# Altium PCB BLE_Motion_Tracker_PCB.PcbDoc
Units mil, origin at the board's own origin, x right, y up, seen from the top; angles counter-clockwise.
Board outline 1500 x 1500 mil, 4 copper layers (Top Layer, Ground Layer, Power Layer, Bottom Layer), stack 23.756 mil thick; 15 components, 15 nets, 79 pads, 22 vias.
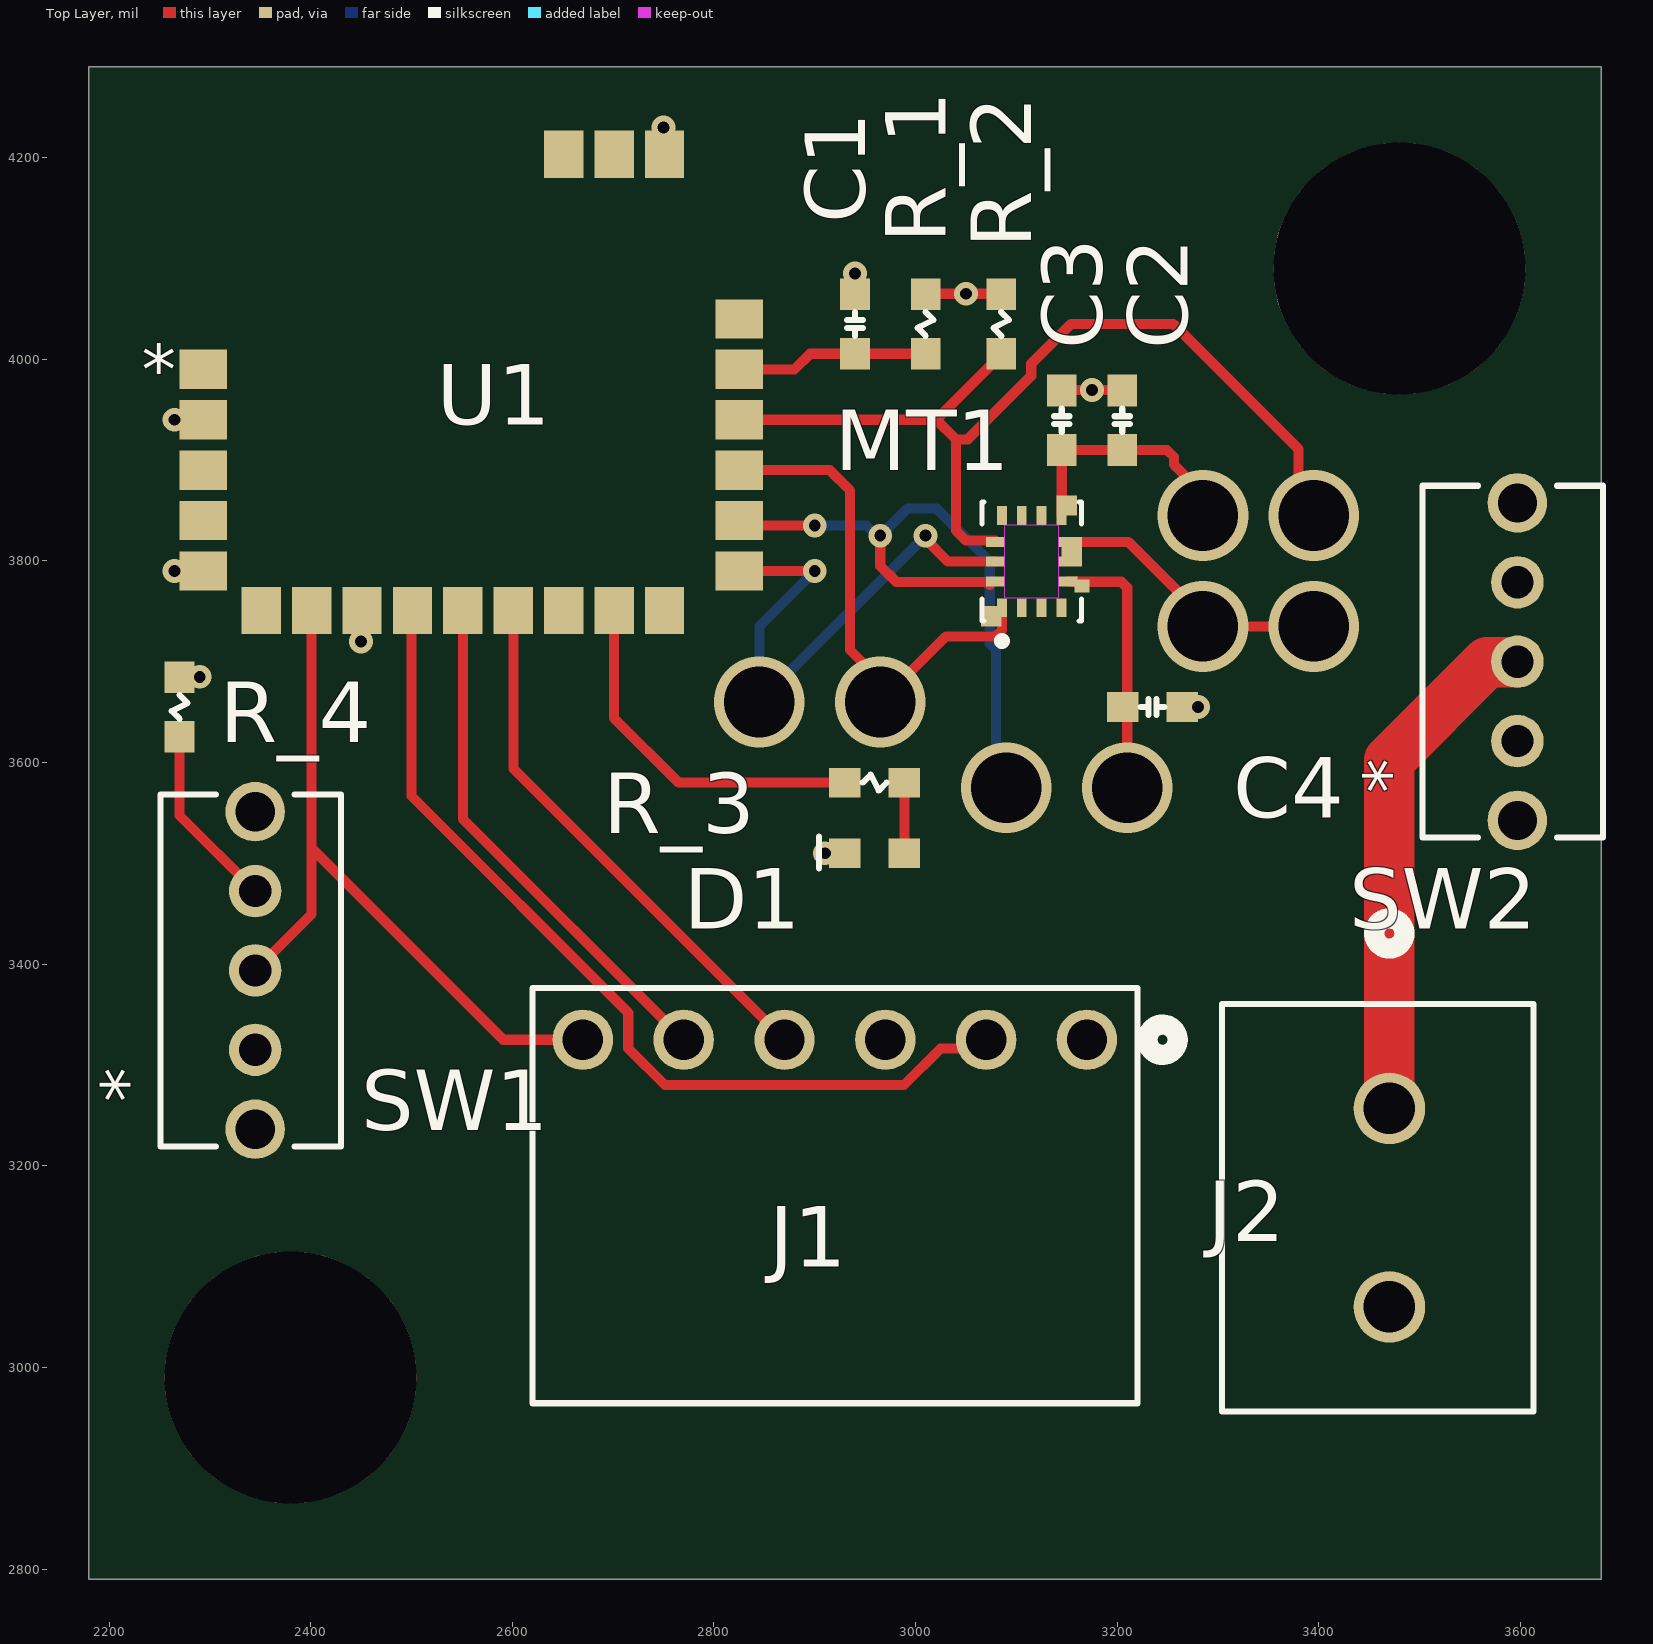
[diagram p0: Top Layer view]
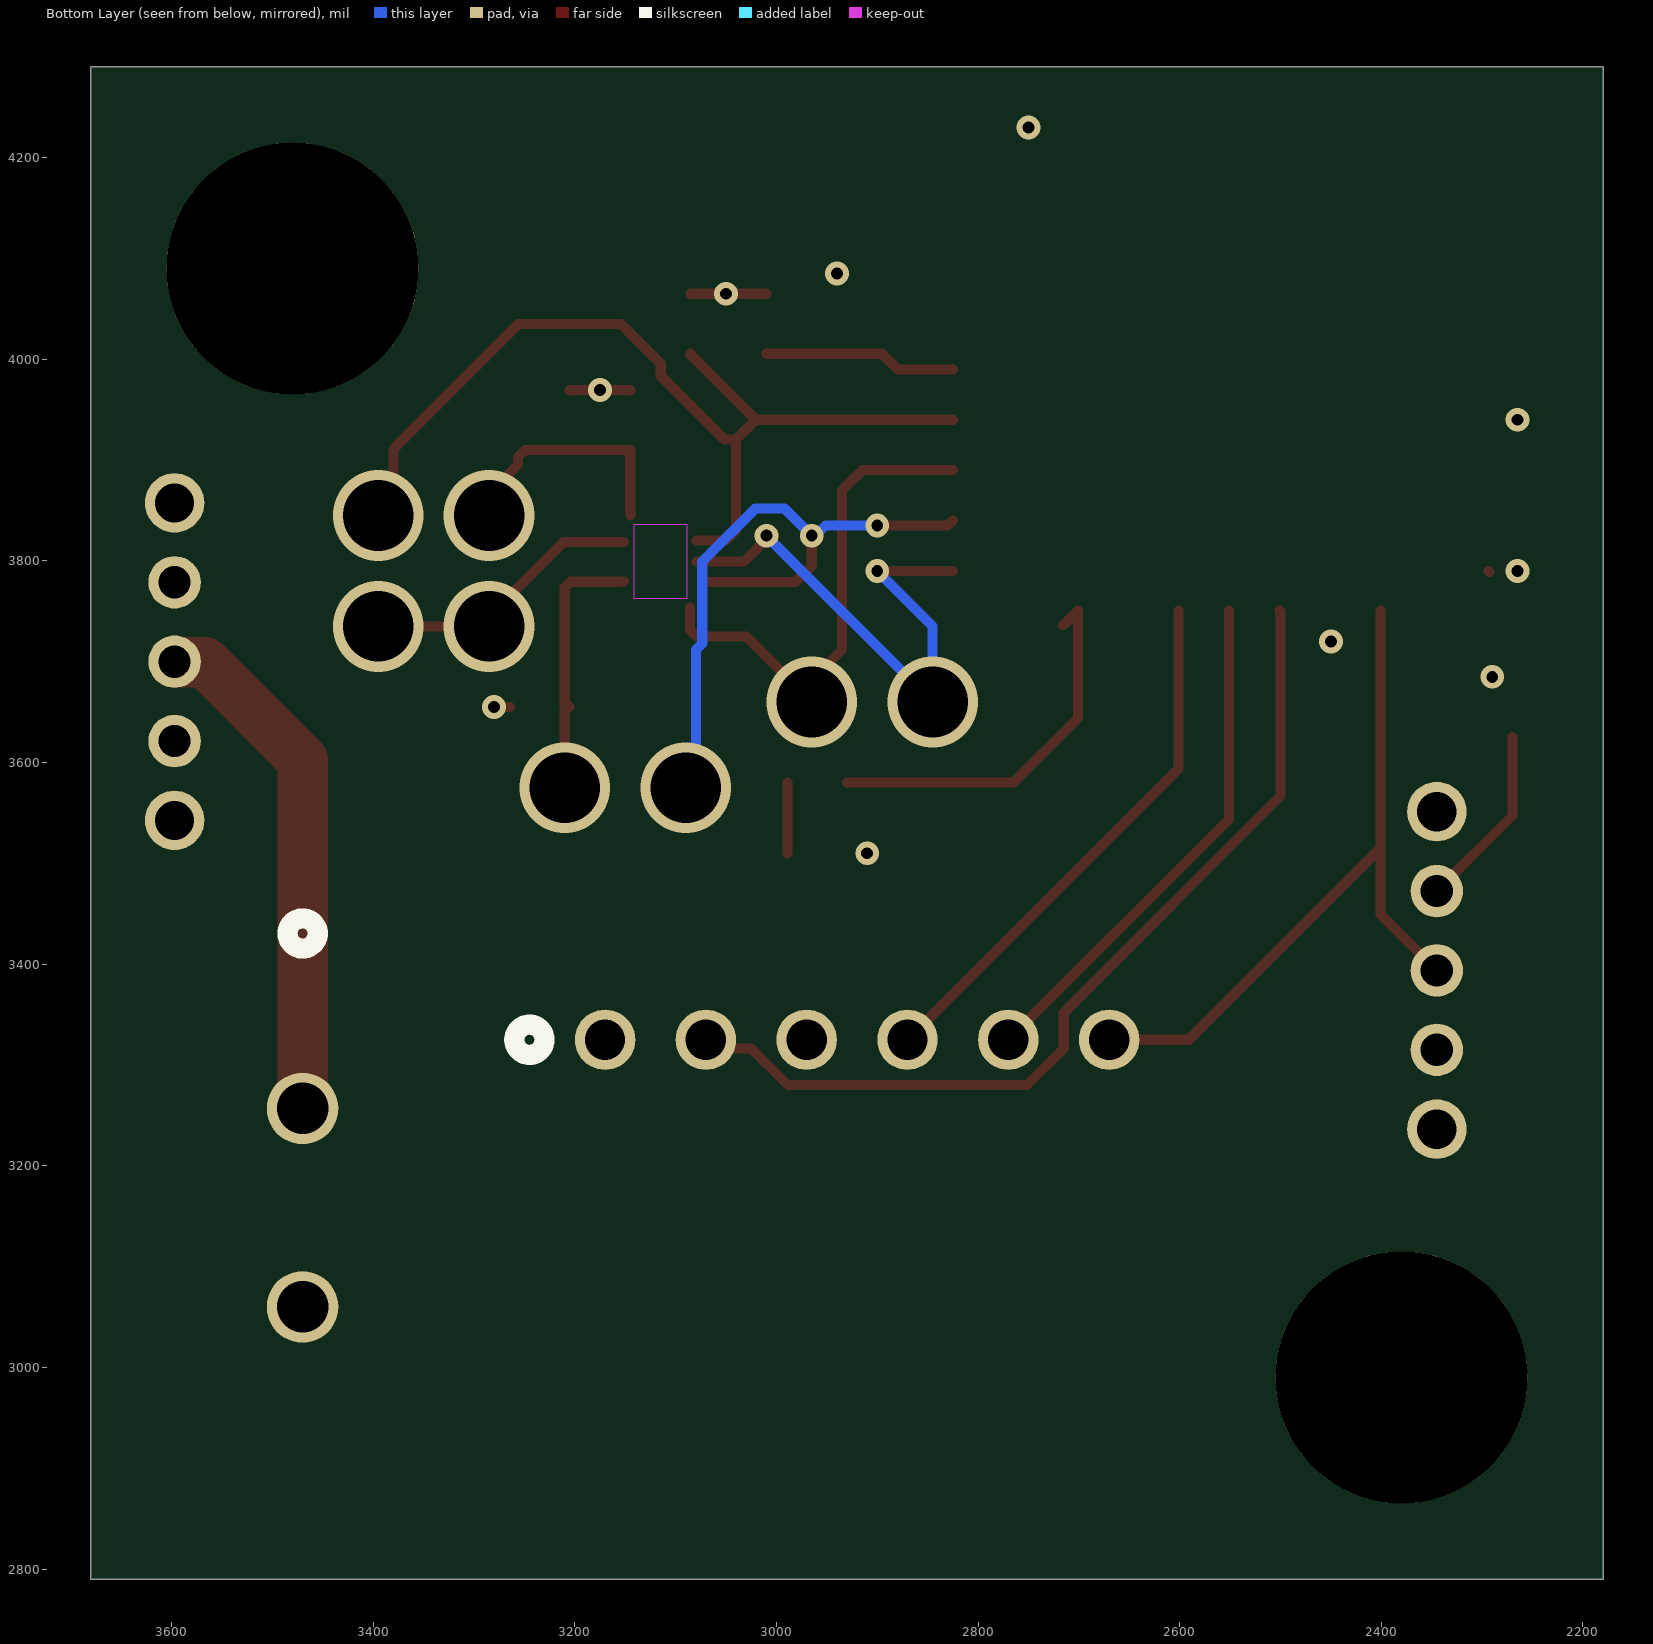
[diagram p1: Bottom Layer view, seen from below]
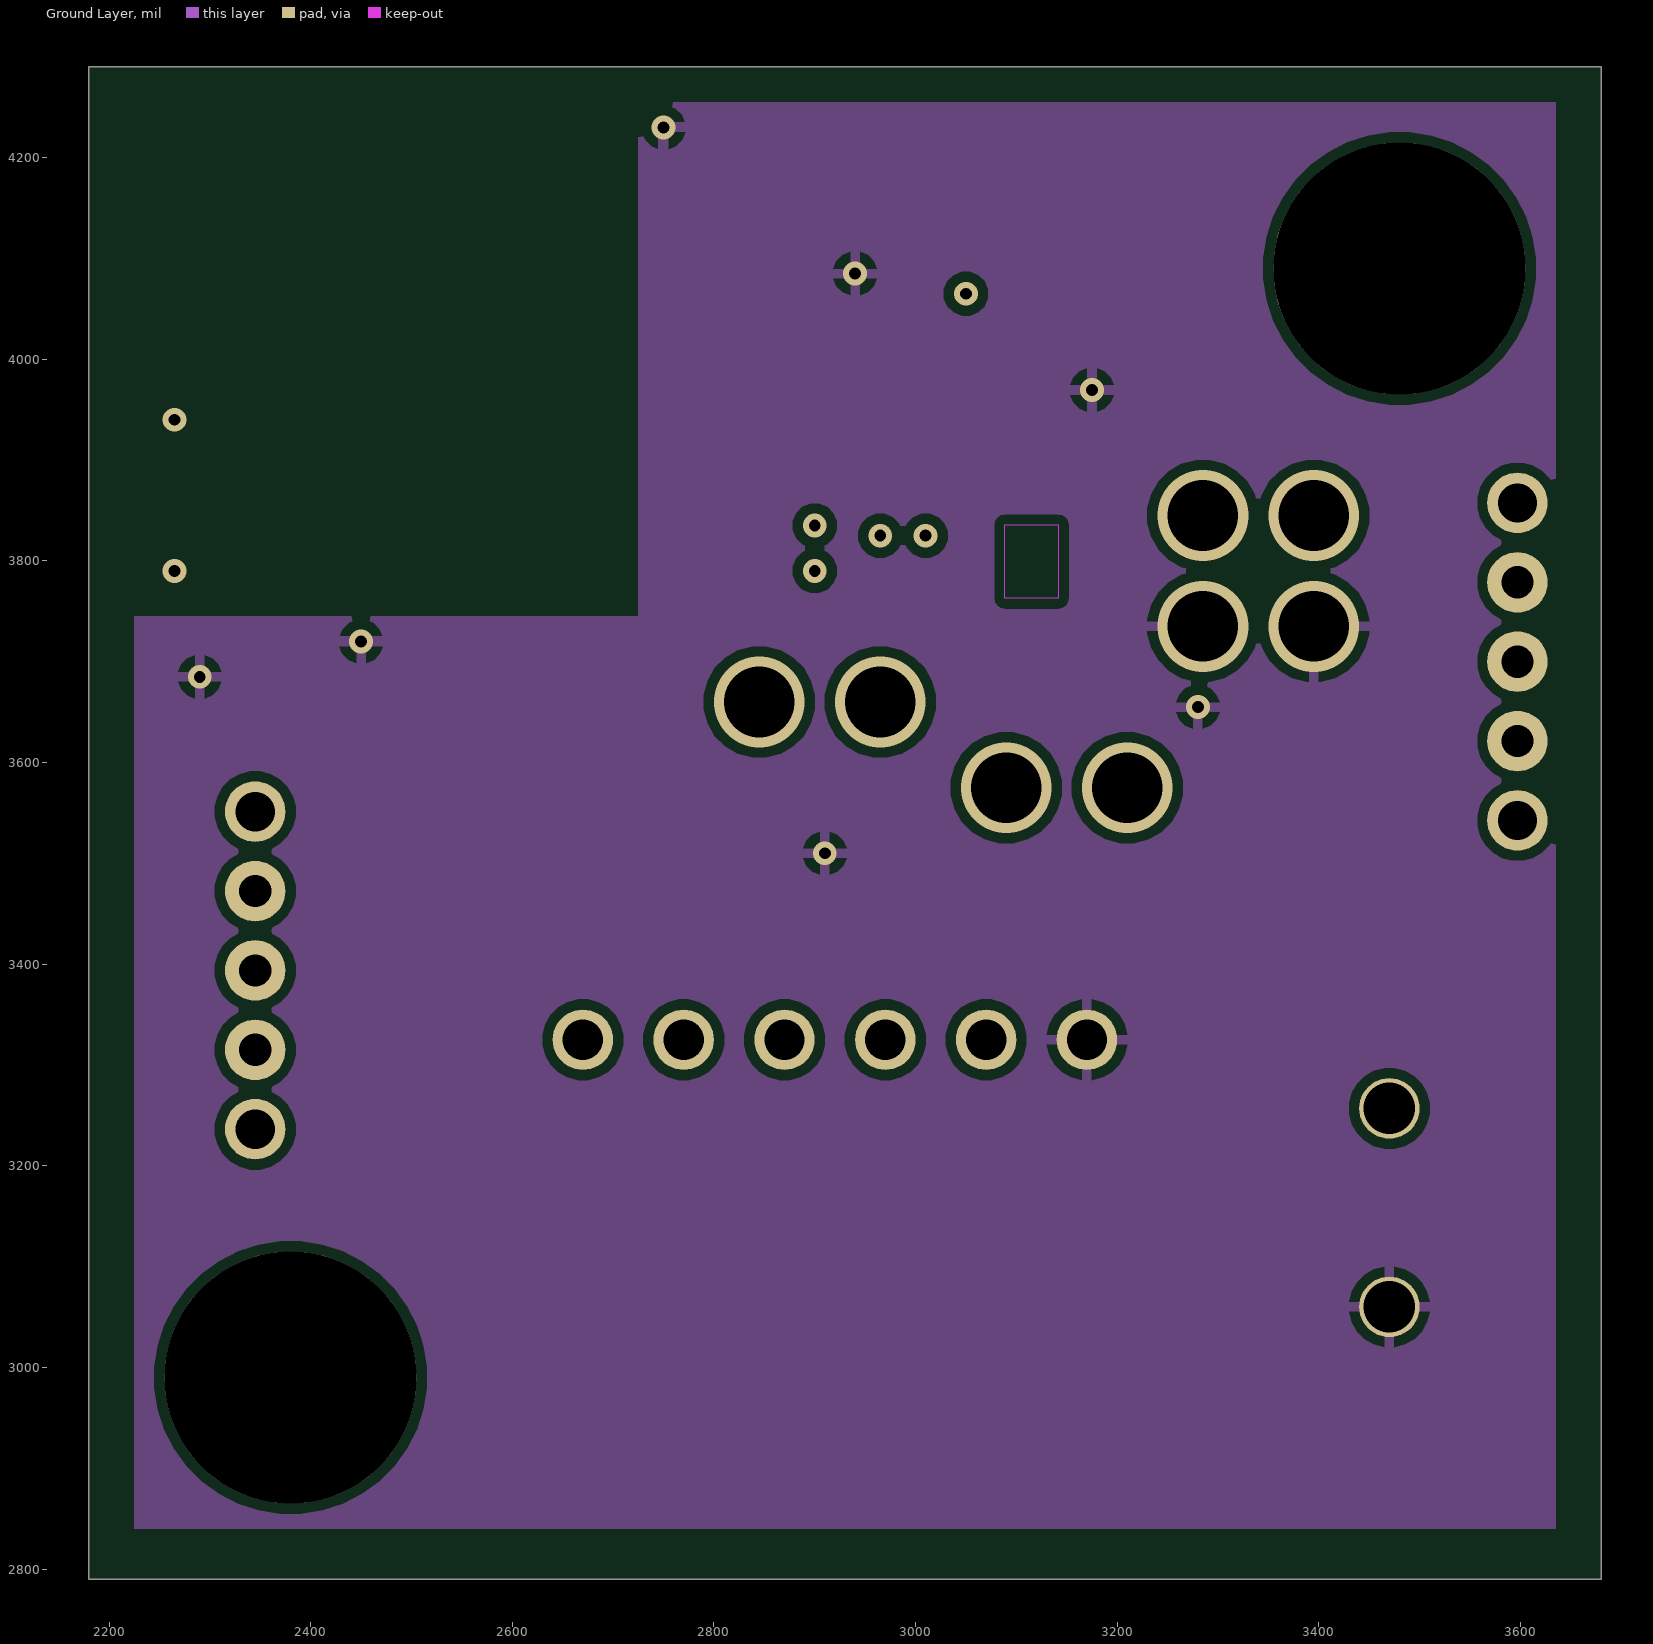
[diagram p2: Ground Layer]
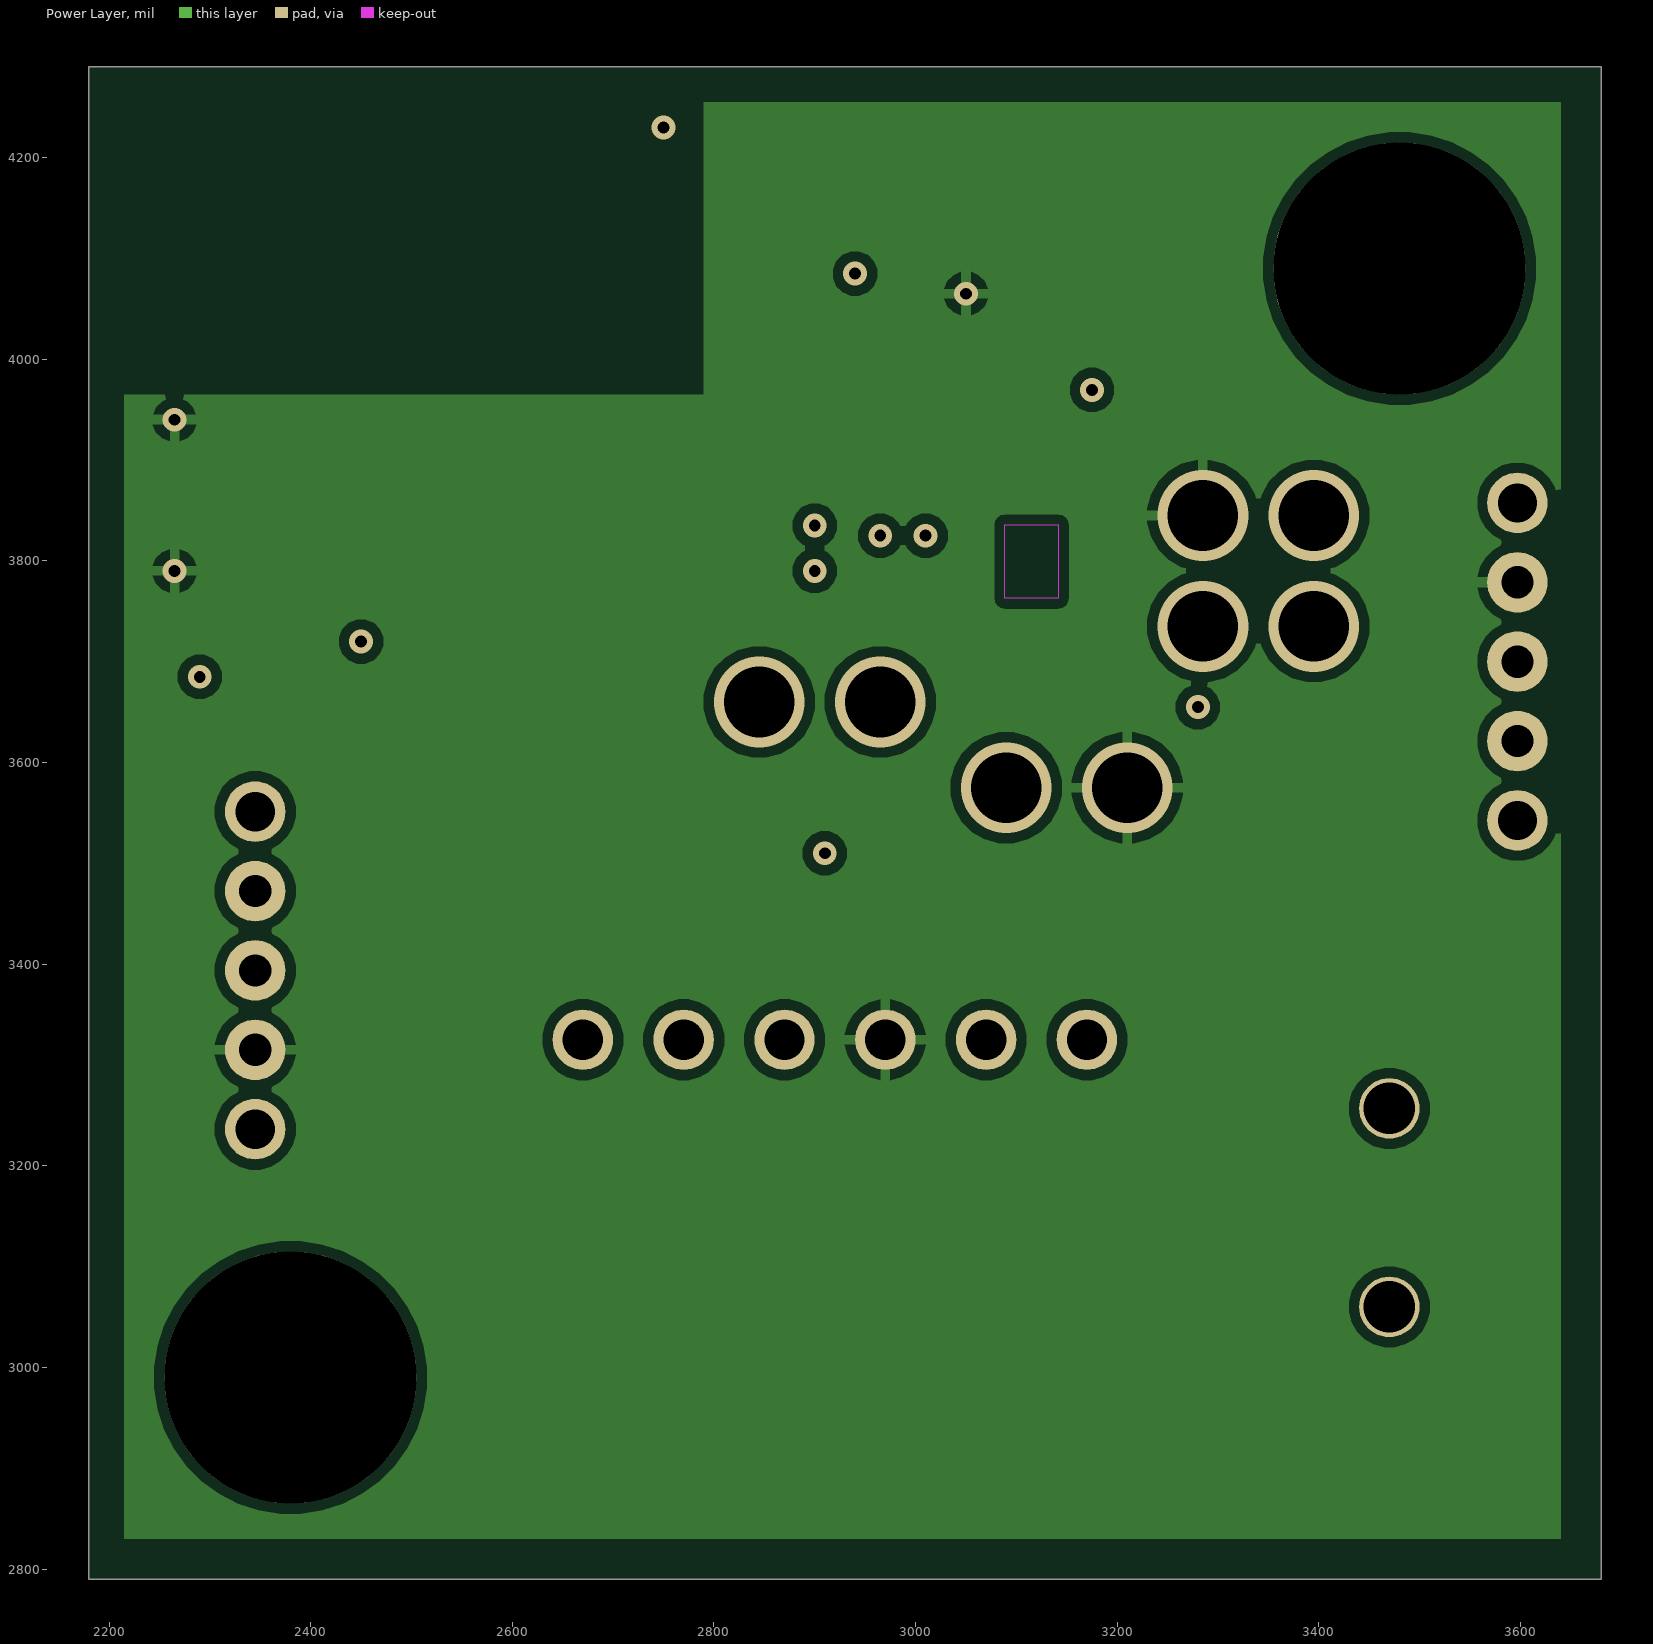
[diagram p3: Power Layer]
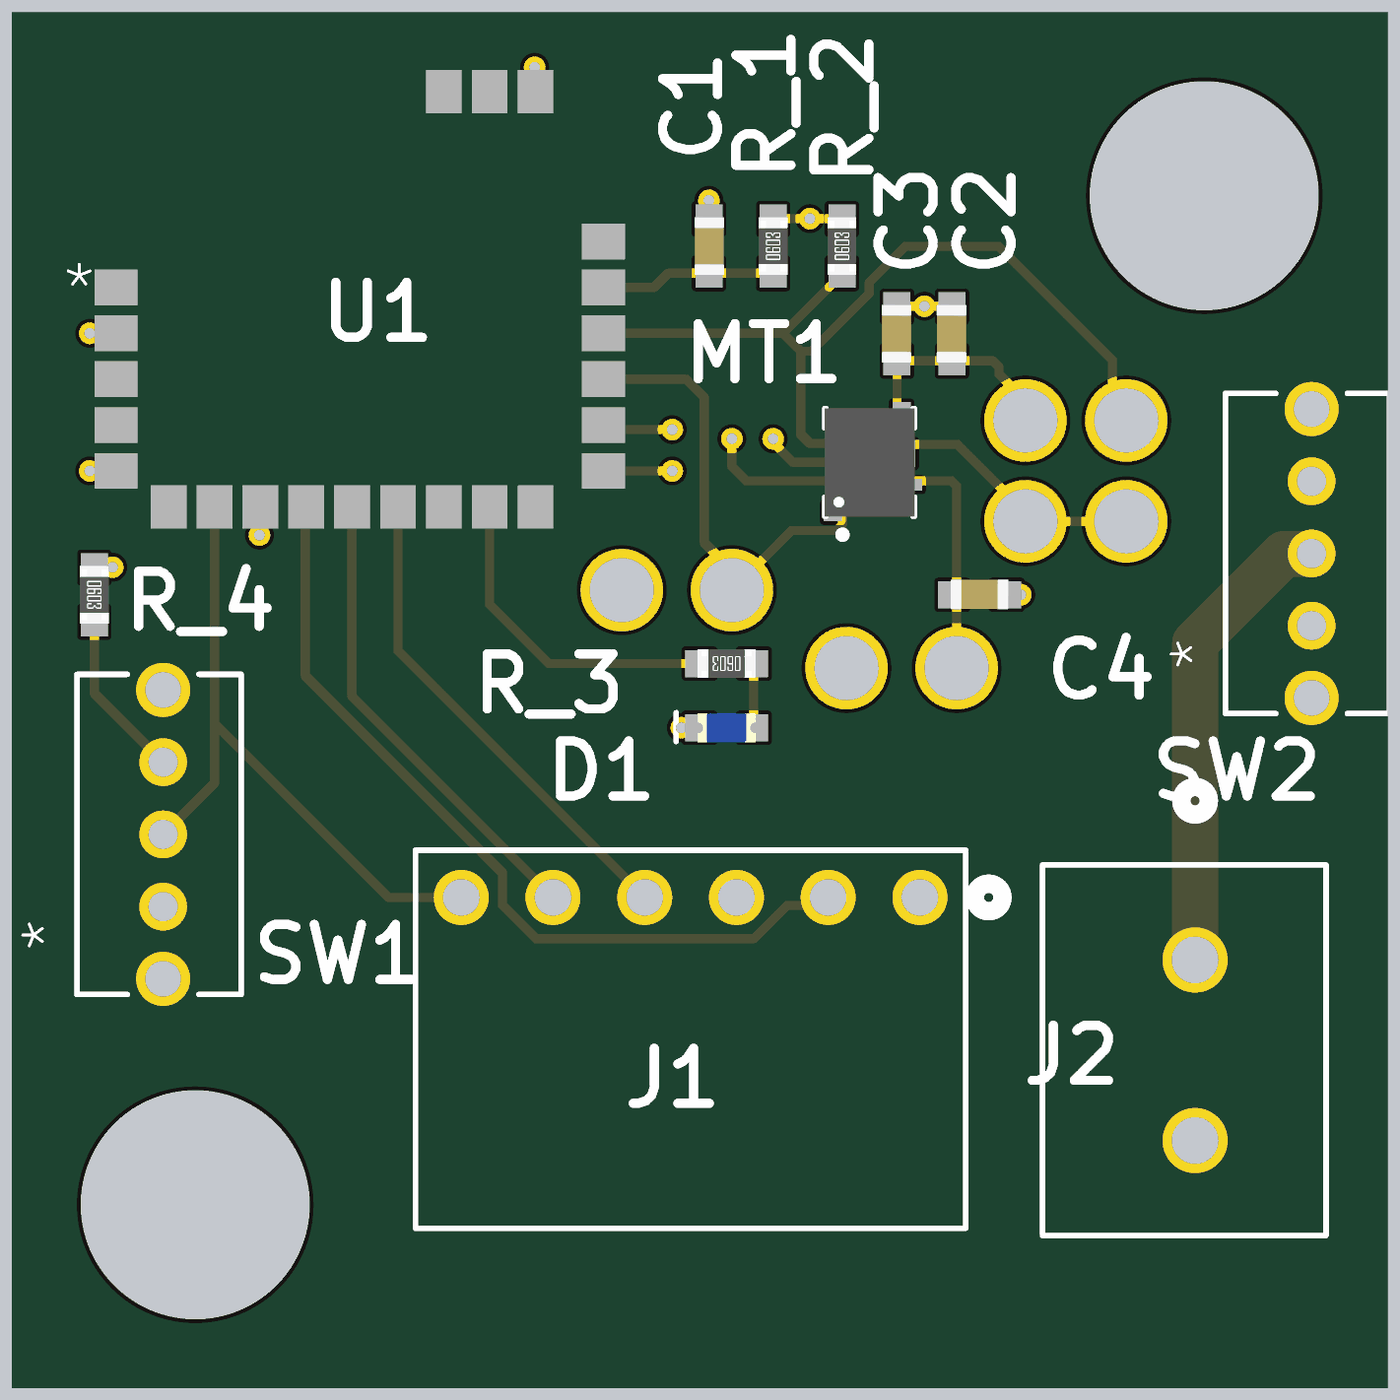
[diagram p4: 3D render of the assembled board from above, using the file's embedded part models]

## Layer stack, top to bottom
Top Solder: solder mask 0.4, Solder Resist, Dk 3.5
Top Layer: signal copper 1.4
Dielectric 2: prepreg 2.8, PP-006, Dk 4.1
Ground Layer: signal copper 1.378
Dielectric 1: dielectric 12.6, FR-4, Dk 4.8
Power Layer: signal copper 1.378
Dielectric 3: prepreg 2.8, PP-006, Dk 4.1
Bottom Layer: signal copper 1.4
Bottom Solder: solder mask 0.4, Solder Resist, Dk 3.5

## Board outline
2180,2790 3680,2790 3680,4290 2180,4290

## Design rules (kind name [scope] priority, off if disabled: settings)
Clearance [All] p1: gap=10 ignorepadtopadclearanceinfootprint=FALSE
PolygonConnect [All] p1: connectstyle=Relief reliefconductorwidth=10 reliefentries=4 polygonreliefangle="90 Angle" airgapwidth=10
RoutingVias [All] p1: holewidth=28 width=50 viastyle="Through Hole" minholewidth=28 minwidth=50 maxholewidth=28 maxwidth=50
SolderMaskExpansion [All] p1: expansion=4 istentingtop=FALSE
SupplyNets "Schematic Supply Nets_1" [InNet('GND')] p1: voltage=0.000
SupplyNets "Schematic Supply Nets" [InNet('3V')] p2: voltage=0.000
Width [All] p1: maxlimit=50 minlimit=10 preferedwidth=10 minimp=50.000000 maximp=50.000000 favimp=50.000000
30 further rules are at their usual default settings.

## Classes and differential pairs
component class Connectors: J1 J2 SW2
component class BLUENRG-M2SA: C1 D1 R_1 R_2 R_3 R_4 SW1 U1
component class Accel: C2 C3 C4 MT1

## Components (designator, comment, footprint, x,y, rotation, side; value= is the part's Value field where it differs from the comment)
C1 "10nF" CAP-0603 2940,4035 r270 top
C2 ".1uF" CAP-0603 3205,3939.53 r90 top
C3 "2.2uF" CAP-0603 3145,3939.53 r90 top
C4 "10nF" CAP-0603 3235,3655 r0 top
D1 "LEDBLUE-0603" LEDBLUE-0603 2959.34,3510 r180 top
J1 "22052061" CONN_22-05-2061_MOL 3170,3325 r0 top
J2 "691137710002" CONN2_710002_WRE 3470,3256.85 r270 top
MT1 "ICM-42670-P" XDCR_ICM-42670-P 3115.16,3799.23 r90 top
R_1 "47K" RES-0603 3010,4035 r90 top
R_2 "47K" RES-0603 3085,4035 r90 top
R_3 "100" RES-0603 2959.34,3580 r180 top
R_4 "47K" RES-0603 2270,3655 r270 top
SW1 "1825232-1" 1825232-1_TEC 2345,3315 r90 top
SW2 "1825232-1" 1825232-1_TEC 3597,3621.26 r90 top
U1 "BLUENRG-M2SA" BLUENRG-2M_STM 2559.25,3977.13 r0 top

## Footprints (in the part's own frame and the unit in brackets; to place one, negate y for a bottom-side part, rotate by r counter-clockwise, add the part's x,y. Pads: shape width x height; smd on the part's side, far side on the other; paste and mask are expansions set on the pad)
1825232-1_TEC [mil]
  round 52 / inner round 60 / far side round 52 hole 32 paste-99999 mask+0: 1(0,0) 2(78.74,0) 3(157.48,0)
  round 59 / inner round 60 / far side round 59 hole 39 paste-99999 mask+0: 4(-78.74,0) 5(236.22,0)
  silkscreen extent -96,-85 253,94
BLUENRG-2M_STM [mil]
  rect 47x39 smd paste+0 mask+0: 1(-265.75,12.87) 2(-265.75,-37.13) 3(-265.75,-87.13) 4(-265.75,-137.13) 5(-265.75,-187.13) 15(265.75,-187.13) 16(265.75,-137.13) 17(265.75,-87.13) 18(265.75,-37.13) 19(265.75,12.87) 20(265.75,62.87)
  rect 39x47 smd paste+0 mask+0: 6(-208.27,-226.38) 7(-158.27,-226.38) 8(-108.27,-226.38) 9(-58.27,-226.38) 10(-8.27,-226.38) 11(41.73,-226.38) 12(91.73,-226.38) 13(141.73,-226.38) 14(191.73,-226.38) 21(191.73,226.38) 22(141.73,226.38) 23(91.73,226.38)
CAP-0603 [mm]
  rect 0.8x0.75 smd: 1(-0.75,0) 2(0.75,0)
  silkscreen extent -0.3,-0.2 0.3,0.2, body extent -0.8,-0.4 0.8,0.42, height 0.81
CONN2_710002_WRE [mil]
  round 71 / inner round 60 / far side round 71 hole 51 paste-99999 mask+0: 1(0,0) 2(196.85,0)
  silkscreen extent -189,-166 300,143
CONN_22-05-2061_MOL [mil]
  round 60 hole 40 paste-99999 mask+0: 1(0,0) 2(-100,0) 3(-200,0) 4(-300,0) 5(-400,0) 6(-500,0)
  silkscreen extent -550,-361 90,51
LEDBLUE-0603 [mm]
  rect 0.8x0.75 smd: A(-0.75,0) K(0.75,0)
  silkscreen extent 1.4,-0.42 1.4,0.38, body extent -0.8,-0.4 0.8,0.4, height 0.53
RES-0603 [mm]
  rect 0.8x0.75 smd: 1(-0.75,0) 2(0.75,0)
  silkscreen extent -0.3,-0.2 0.3,0.2, body extent -0.8,-0.4 0.8,0.4, height 0.44
XDCR_ICM-42670-P [mm]
  rect 0.475x0.25 smd paste-1 mask+0.05: 1(-1.162,0.75) 2(-1.162,0.25) 3(-1.162,-0.25) 4(-1.162,-0.75) 8(1.162,-0.75) 9(1.162,-0.25) 10(1.162,0.25) 11(1.162,0.75)
  rect 0.25x0.475 smd paste-1 mask+0.05: 5(-0.5,-0.913) 6(0,-0.913) 7(0.5,-0.913) 12(0.5,0.913) 13(0,0.913) 14(-0.5,0.913)
  Keep-Out Layer region: 0.925,-0.675 -0.925,-0.675 -0.925,0.675 0.925,0.675
  silkscreen extent -2.1,-1.25 1.5,1.25, body extent -1.5,-1.25 1.5,1.25, height 0.81

## Part data
C1 C2 C3 C4: library part CMP-009-000303-1, Design Item ID=CAP-0603, Source=ife19_Elec_Library.SchLib
D1: library part CMP-009-000191-1, Design Item ID=LEDBLUE-0603, Source=ife19_Elec_Library.SchLib
J1: "FTDI UART Flashing connector -- https://www.mouser.com/ProductDetail/Molex/22-05-2061?qs=th8CuLdcYnn%252BP%252BN0RJkmpg%3D%3D", Mfr_Name="Molex Connector Corporation", RefDes=RefDes, Type=Type
J2: "Connector to provide Battery voltage -- https://www.mouser.com/ProductDetail/Wurth-Elektronik/691137910002?qs=sPbYRqrBIVkdp9j8kfiV1w%3D%3D", Mfr_Name="Wurth Electronics", RefDes=RefDes, Type=Type
MT1: "https://www.mouser.com/ProductDetail/TDK-InvenSense/ICM-42670-P?qs=iLbezkQI%2BsgK8sMF5V7fQQ%3D%3D", Package=None, Availability=Unavailable, MP=ICM-42670-P, Price=None
R_1 R_2 R_3 R_4: library part CMP-014-000032-1, Design Item ID=RES-0603, Source=ife19_Elec_Library.SchLib
SW1 SW2: "https://www.mouser.com/ProductDetail/655-1825232-1", Mfr_Name="TE Connectivity", RefDes=RefDes, Type=Type
U1: "https://www.mouser.com/ProductDetail/STMicroelectronics/BLUENRG-M2SA?qs=%252B6g0mu59x7K3hjyySj690A%3D%3D", Mfr_Name=STMicroelectronics, RefDes=RefDes, Type=Type

## Free pads (board coordinates)
  rect 20x20 smd: 2(3075,3745) 4(3150,3855)
  rect 20x29 smd: 3(3155,3809)
  rect 15x13 smd: 6(3165,3775)
  round 250 hole 250 unplated: 8(3480,4090) 9(2380,2990)

## Via types
v1: diameter 23.62, hole 11.81, Top Layer to Bottom Layer, 14 vias
v2: diameter 90, hole 70, Top Layer to Bottom Layer, 8 vias

## Nets (pads, with @x,y where several pads share a name; then routed paths per layer and width w, separated by ;. In a path a pad name is that pad's centre, name@x,y a point inside that pad or via, vN(x,y) a via of type N, cw(c..) or ccw(c..) an arc to the next point about the centre after c; other vN are vias at no path point)
3V: C2.1 C3.1 C4.1 J1.3 MT1.5 MT1.8 pad.4 pad.6 R_1.2 R_2.2 SW1.1 SW2.3 U1.2 U1.5 | length 587.6
  Top Layer w10: U1.5@2292.6,3789.09 U1.5 ; R_1.2 3010.47,4065 v1(3050,4065) 3084.53,4065 R_2.2 ; MT1.8 3144.69,3849.27 3145,3849.59 C3.1 C2.1 3249.18,3910 3256.25,3902.93 3256.25,3895.4 3285,3866.65 v2(3285,3845) ; MT1.5 3155.43,3779.55 3155.67,3779.31 3204.14,3779.31 3210,3773.45 3210,3659.53 C4.1 ; v2(3210,3575) C4.1@3210,3655
  other v1: 2265,3790 2265,3940
GND: C1.1 C2.2 C3.2 C4.2 D1.K J1.1 J2.2 MT1.6 MT1.7 pad.3 R_4.1 U1.8 U1.21 | length 360.4
  Top Layer w10: C3.2 3145.47,3969.53 v1(3175,3969.53) 3204.53,3969.53 C2.2 ; MT1.7 3211.08,3818.92 3285,3745 v2(3285,3735) v2(3395,3735) ; C4.2 v1(3280,3655)
  other v1: 2910,3510 2290,3685 2450,3720 2940,4085 2750,4230
NetC1_2: C1.2 R_1.1 U1.19 | length 191.4
  Top Layer w10: U1.19 2880,3990 2895.47,4005.47 C1.2 R_1.1
NetD1_A: D1.A R_3.1 | length 70
  Top Layer w10: D1.A R_3.1
NetJ1_2: J1.2 U1.9 | length 912.6
  Top Layer w10: U1.9 2500,3749.76 2500,3566.72 2715,3351.72 2715,3316.36 2751.36,3280 2988.64,3280 3025,3316.36 3061.36,3316.36 J1.2
NetJ1_4: J1.4 U1.11 | length 537.2
  Top Layer w10: U1.11 2600.98,3594.02 J1.4
NetJ1_5: J1.5 U1.10 | length 516.5
  Top Layer w10: U1.10 2550.98,3544.02 J1.5
NetJ1_6: J1.6 SW1.2 U1.7 | length 727.9
  Top Layer w10: SW1.2 2400.98,3449.72 2400.98,3515 ; U1.7 2400.98,3515 ; J1.6 2590.98,3325 2400.98,3515
NetJ2_1: J2.1 SW2.2 | length 512.5
  Top Layer w50: J2.1 3470,3602.53 3567.09,3699.62 SW2.2@3596.62,3699.62
NetMT1_1: MT1.1 pad.2 U1.17 | length 512.9
  Top Layer w10: U1.17 2915,3890 2935,3870 2935,3711.65 2965,3681.65 v2(2965,3660) 3030,3725 3079.14,3725 3085.63,3731.49 MT1.1
NetMT1_12: MT1.12 R_2.1 U1.18 | length 971.9
  Top Layer w10: U1.18 3020.51,3940 ; MT1.12@3079.23,3820 3050,3820 3040,3830 3040,3920.51 ; R_2.1 3085,4004.49 3020.51,3940 ; v2@3395,3840 3379.69,3855.31 3379.69,3911.09 3255.98,4034.8 3154.02,4034.8 3114.76,3995.54 3114.76,3983.51 3051.76,3920.51 3040,3920.51 ; 3020.51,3940 3040,3920.51
  other v2: 3395,3845
NetMT1_13: MT1.13 U1.15 | length 542.2
  Top Layer w10: U1.15 v1(2900,3790) ; v1(3010,3825) 3010,3821.31 3032.08,3799.23 MT1.13
  Bottom Layer w10: v2(2845,3660) v2@2845,3662.5 ; v1(2900,3790) 2845,3735 v2@2845,3662.5 ; v1(3010,3825) 2847.5,3662.5 v2@2845,3662.5
NetMT1_14: MT1.14 U1.16 | length 670.2
  Top Layer w10: U1.16 2830,3835 v1(2900,3835) ; v1(2965,3825) 2965,3795 2980.77,3779.23 3070.36,3779.23 MT1.14@3073.58,3776.01
  Bottom Layer w10: v1(2900,3835) 2951.31,3835 2961.31,3825 v1(2965,3825) 2991.81,3851.81 3021.11,3851.81 3073.58,3799.33 3073.58,3718.07 3079.69,3711.96 3079.69,3580.31 v2@3090,3570
  other v2: 3090,3575
NetR_3_2: R_3.2 U1.13 | length 382.6
  Top Layer w10: U1.13@2715.48,3736.25 U1.13 2700.98,3644.02 2765,3580 R_3.2
NetR_4_2: R_4.2 SW1.3 | length 184.1
  Top Layer w10: R_4.2 2270,3547.48 SW1.3
pads on no net: MT1.2 MT1.3 MT1.4 MT1.9 MT1.10 MT1.11 SW1.4 SW1.5 SW2.1 SW2.4 SW2.5 U1.1 U1.3 U1.4 U1.6 U1.12 U1.14 U1.20 U1.22 U1.23

## Polygon pours and split planes (outlines as drawn)
GND on Ground Layer "GND_L02_P000" (solid, pour order 0): 2225,3745 2725,3745 2725,4255 3635,4255 3635,2840 2225,2840
3V on Power Layer "3V_L03_P002" (solid, pour order 2): 2215,3965 2790,3965 2790,4255 3640,4255 3640,2830 2215,2830

## Silkscreen, mask and mechanical layers (free items; w line width, h text height)
Mechanical 1:
  the board outline again, w10

## Dimensions
2380,2990 to 2180,2790 on Mechanical 1
2380,2990 to 2180,2790 on Mechanical 1
3480,4090 to 3680,4290 on Mechanical 1
3680,4290 to 3480,4090 on Mechanical 1
2180,4290 to 2180,2790 on Mechanical 1
3680,2790 to 2180,4290 on Mechanical 1

## Text inside footprints (layer, text, board x,y; h text height)
SW1: Top Overlay "*" at 2242,3263.13 h50 r90; Mechanical 13 "*" at 2247.5,3263.13 h50 r90
SW2: Top Overlay "*" at 3494,3569.39 h50 r90; Mechanical 13 "*" at 3499.5,3569.39 h50 r90
U1: Top Overlay "*" at 2232.5,3965 h50; Mechanical 13 "*" at 2329.5,3965 h50